# Altium PCB BenchSignalGenerator.PcbDoc (part 1 of 3)
Units mm, origin at the board's own origin, x right, y up, seen from the top; angles counter-clockwise.
Board outline 98.17 x 87.5 mm, 4 copper layers (Top Layer, Ground, 3.3, Bottom Layer), stack 0.603 mm thick; 75 components, 70 nets, 305 pads, 51 vias.
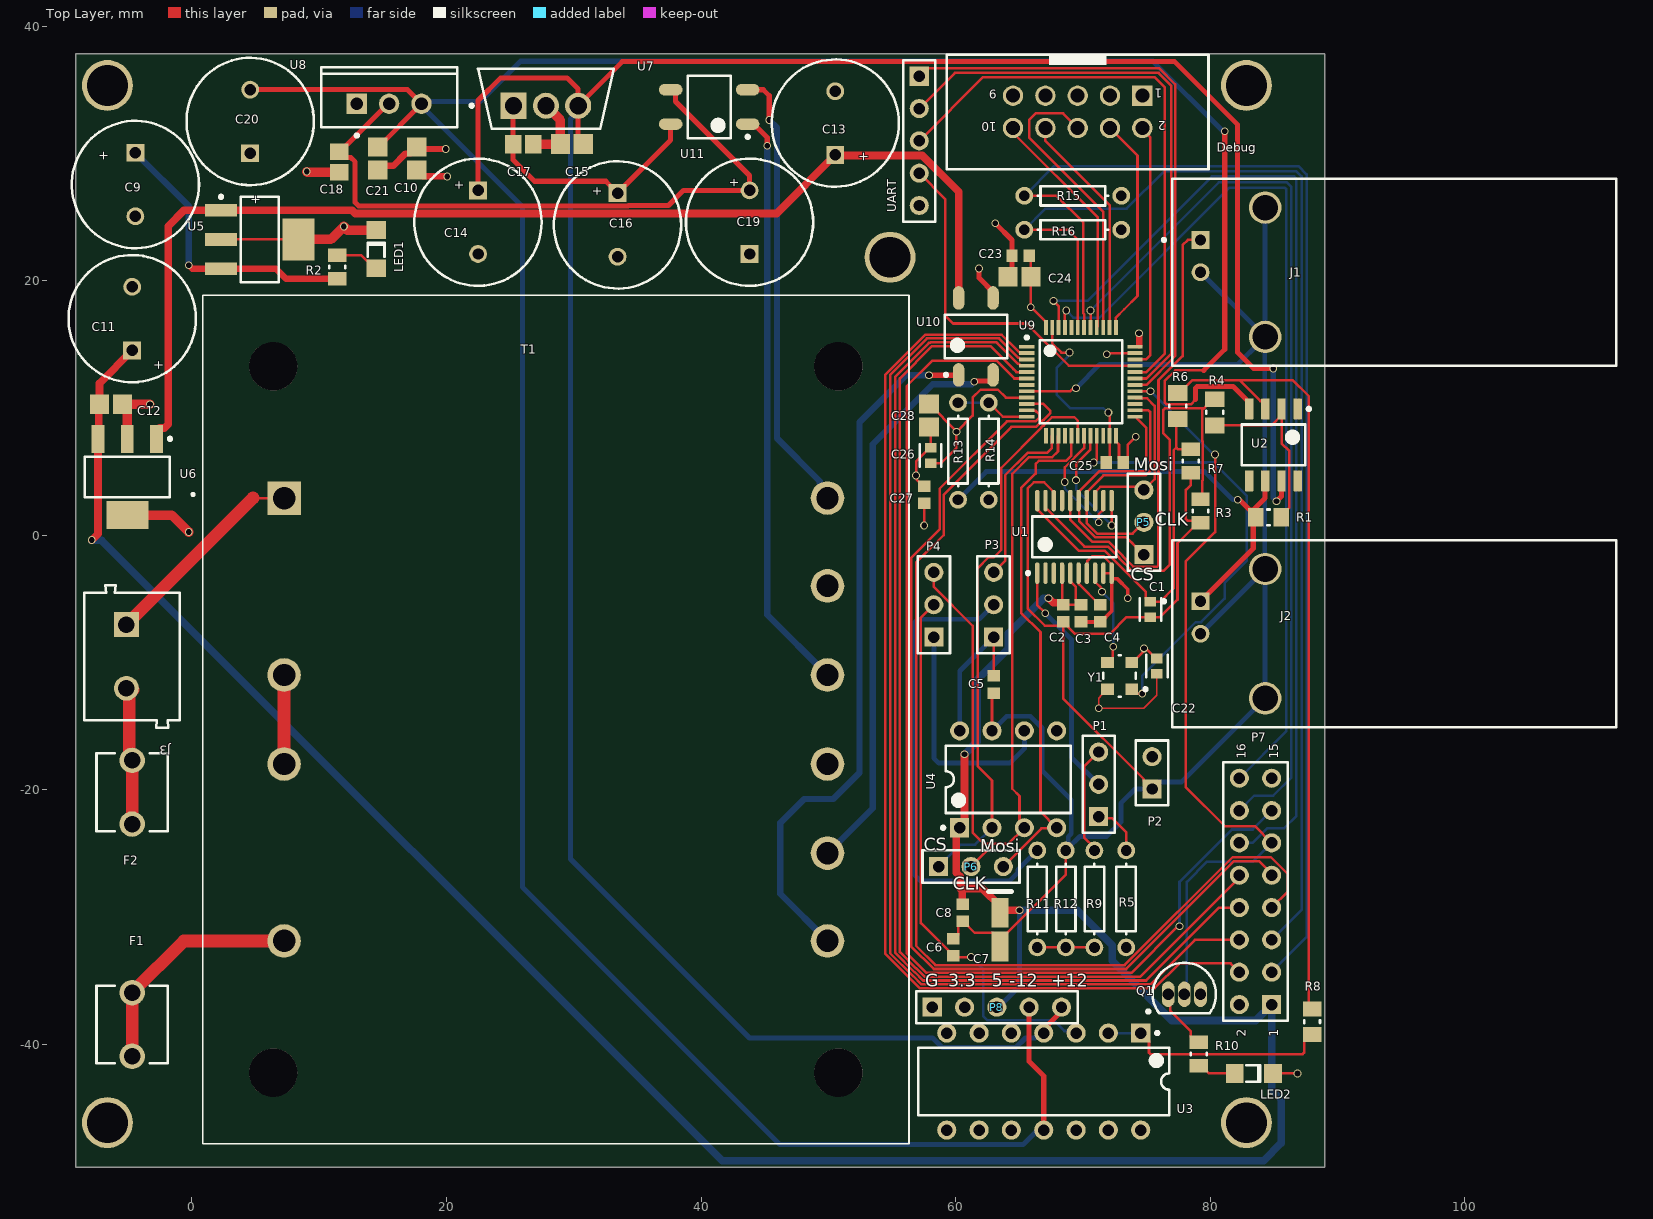
[diagram p0: Top Layer view]
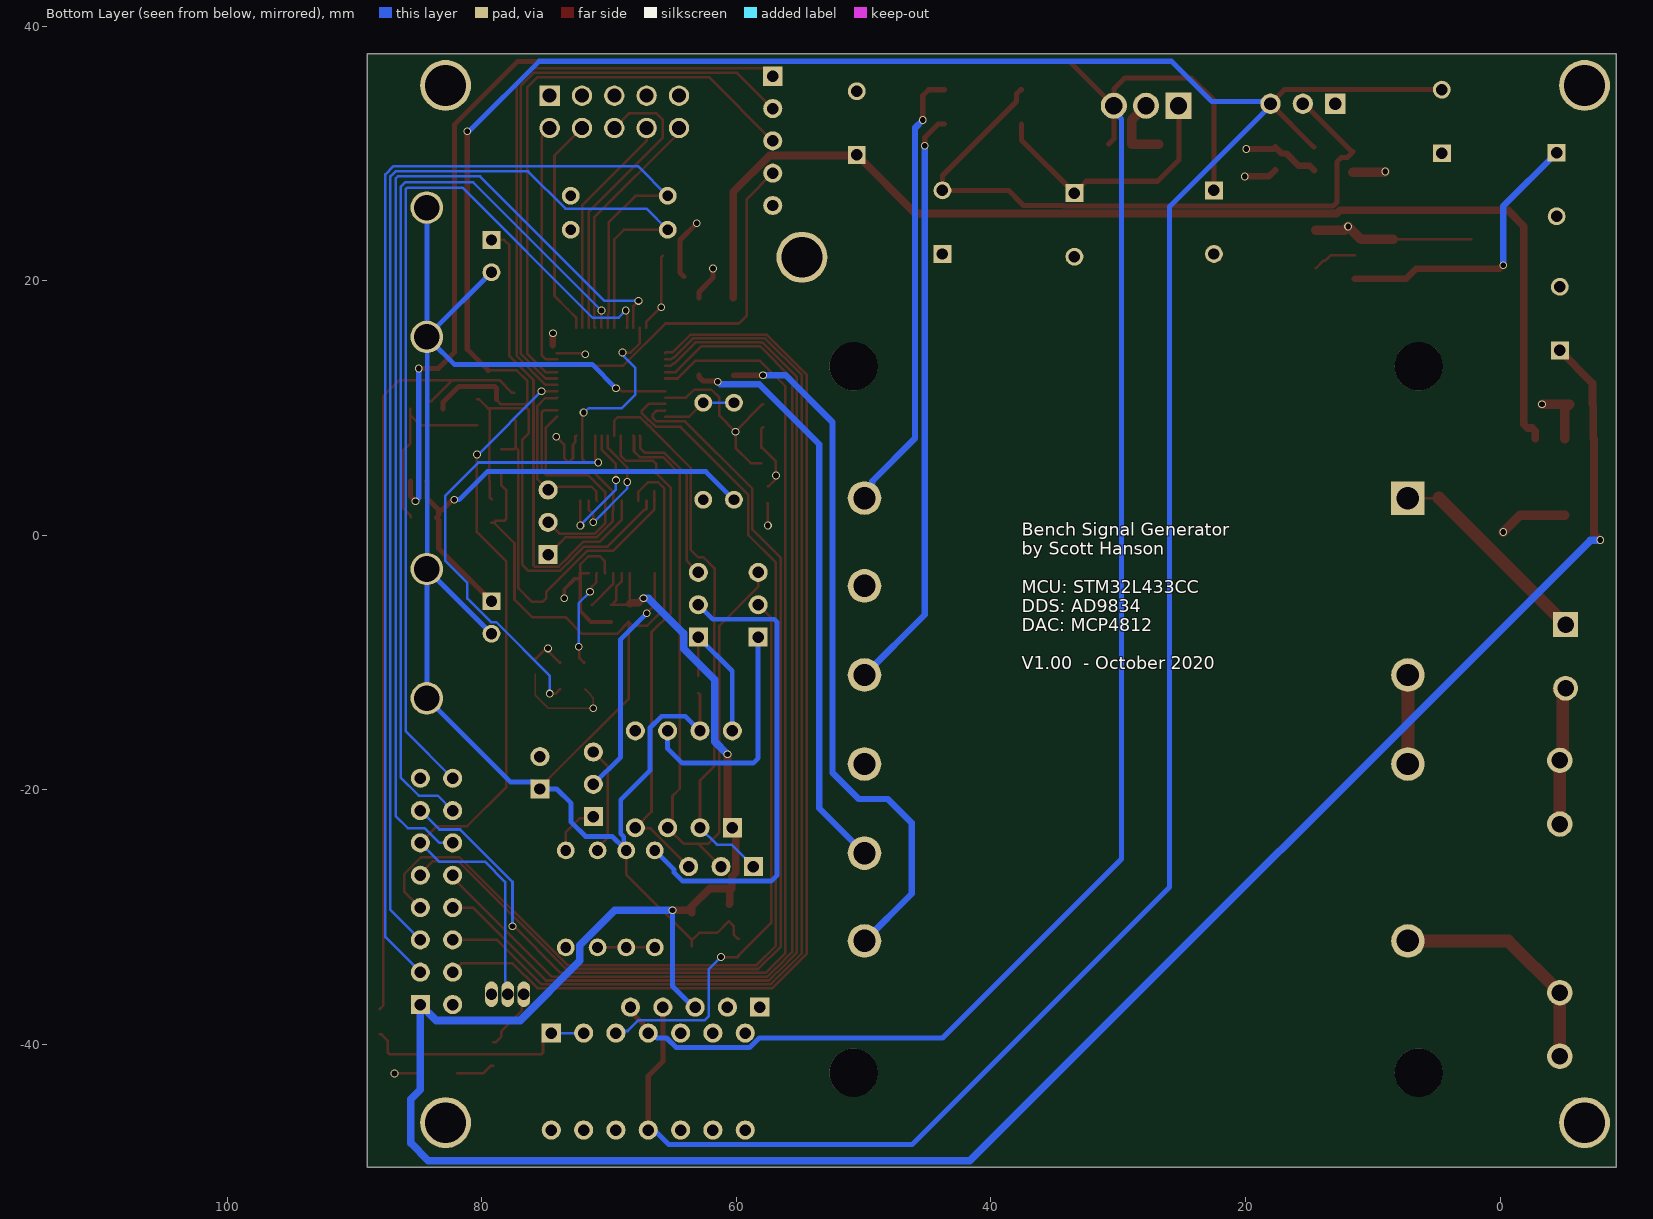
[diagram p1: Bottom Layer view, seen from below]
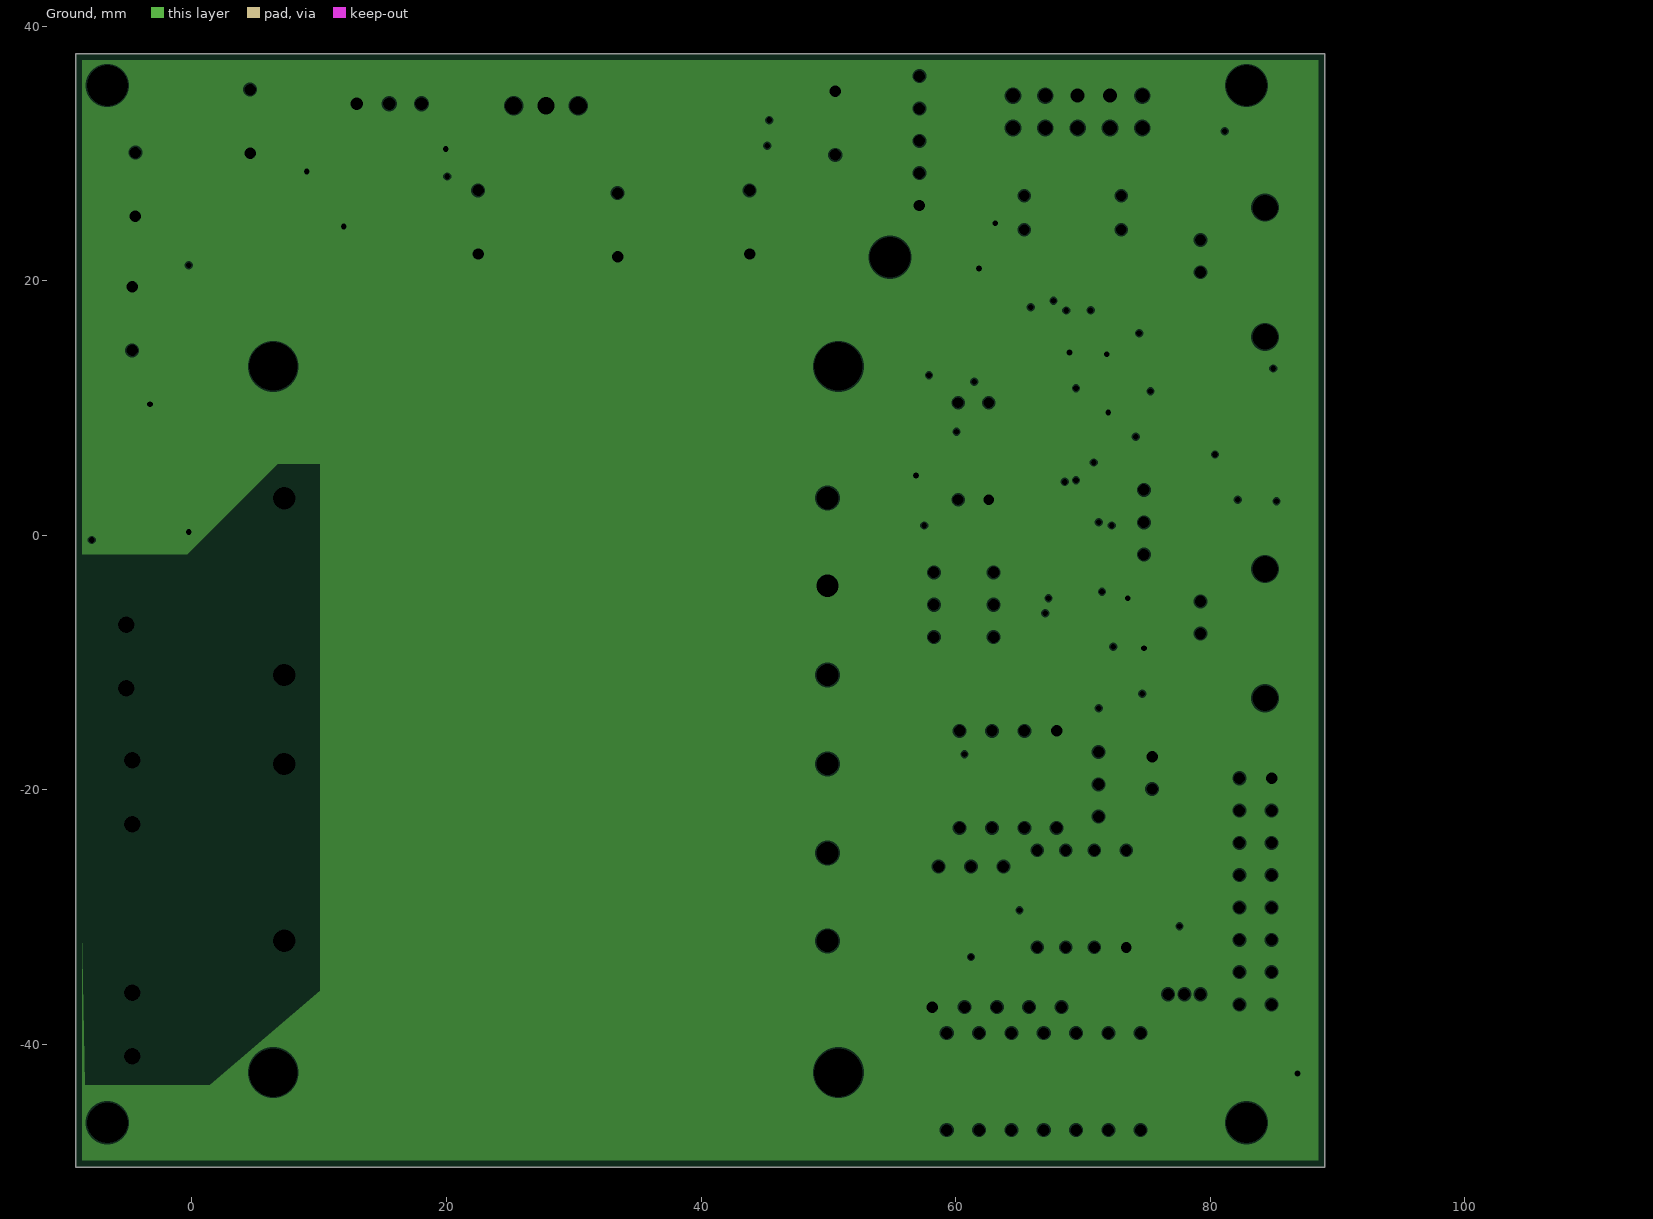
[diagram p2: Ground, clearances drawn from the general rule]
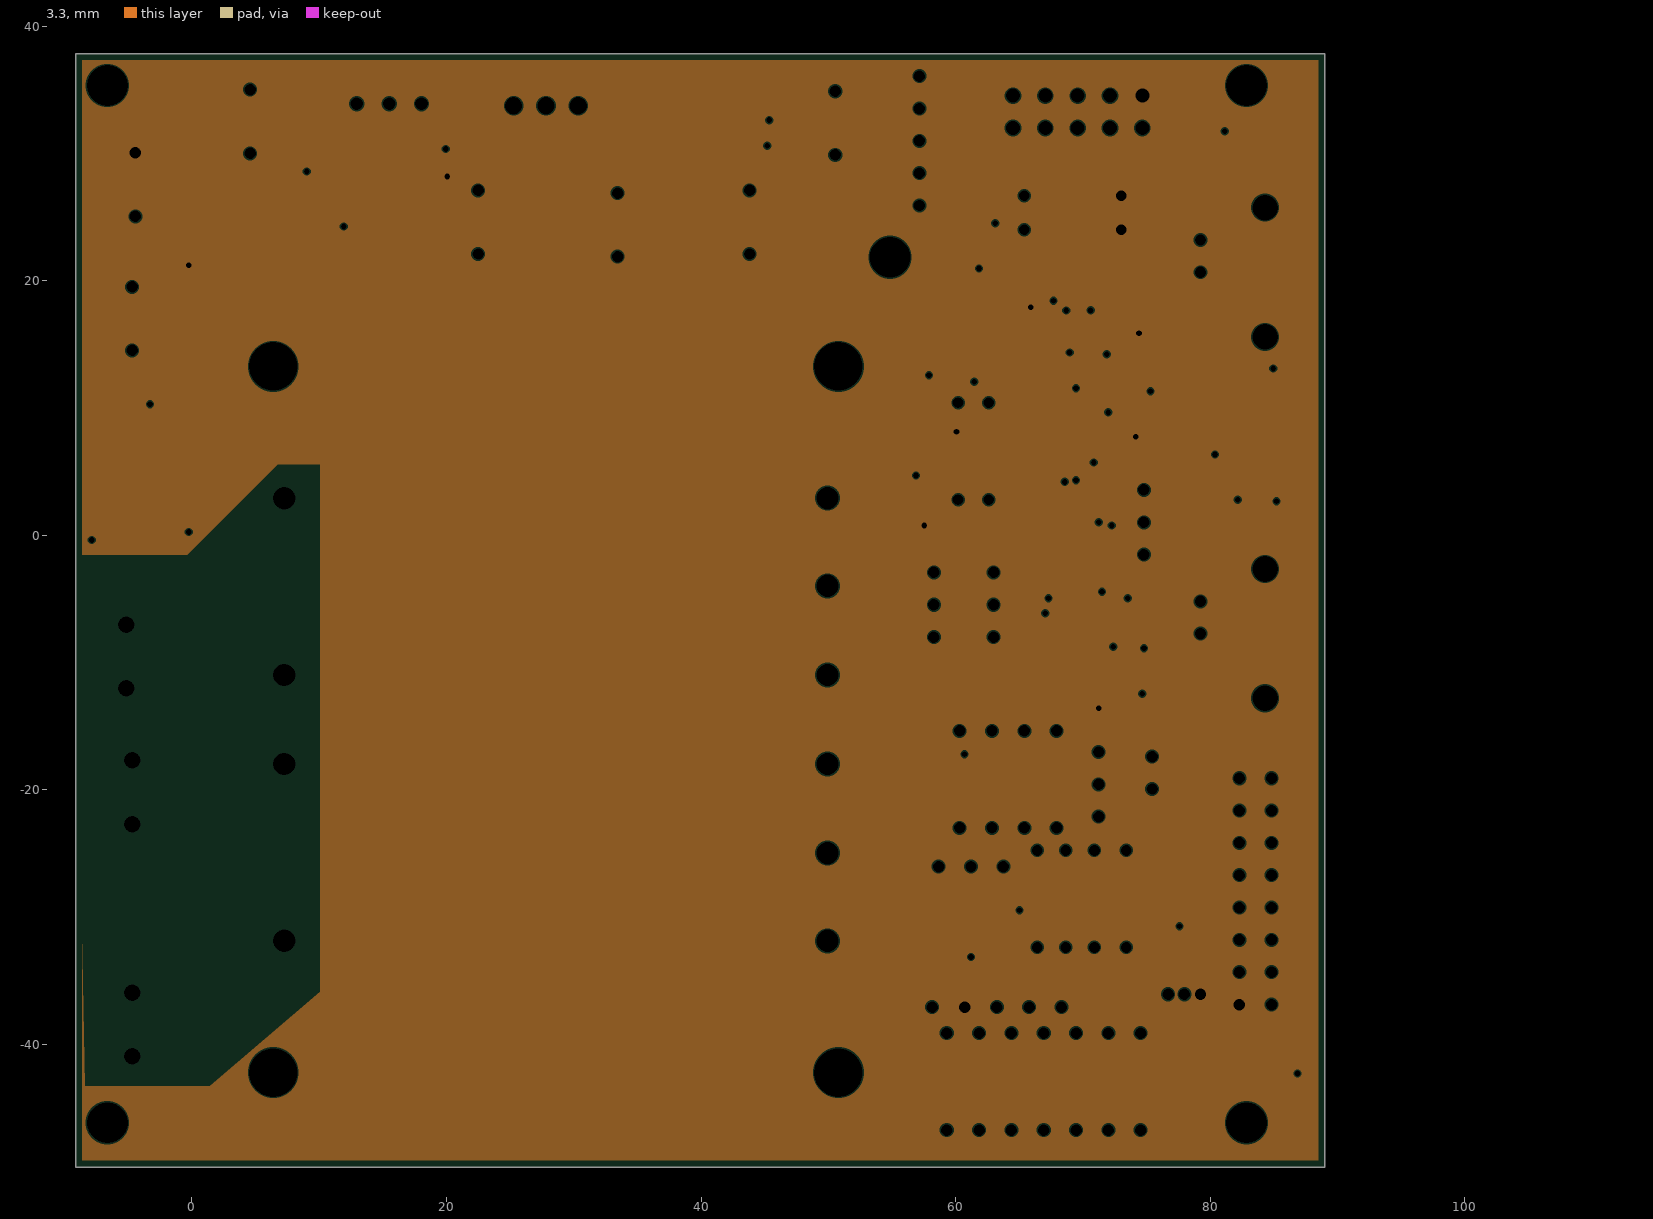
[diagram p3: 3.3, clearances drawn from the general rule]

## Layer stack, top to bottom
Top Solder: solder mask 0.0102, Solder Resist, Dk 3.5
Top Layer: signal copper 0.0356
Dielectric 2: prepreg 0.0711, PP-006, Dk 4.1
Ground: plane copper 0.035, net GND
Dielectric 1: dielectric 0.32, FR-4, Dk 4.8
3.3: plane copper 0.035, net +3.3
Dielectric 3: prepreg 0.0711, PP-006, Dk 4.1
Bottom Layer: signal copper 0.0356
Bottom Solder: solder mask 0.0102, Solder Resist, Dk 3.5

## Board outline
-9.144,-49.67 89.027,-49.67 89.027,37.833 -9.144,37.833

## Design rules (kind name [scope] priority, off if disabled: settings)
BoardOutlineClearance [All] p1: gap=0.2 ignorepadtopadclearanceinfootprint=FALSE
Clearance [All] p1: gap=0.102 ignorepadtopadclearanceinfootprint=FALSE except(0.127: Arc-Via Track-Via SMDPad-Via THPad-Via Via-Via Via-Fill Via-Poly Via-Region Via-Text; 0.25: Arc-Hole Track-Hole SMDPad-Hole THPad-Hole Via-Hole Fill-Hole Poly-Hole Region-Hole Text-Hole)
ComponentClearance [All] p1: gap=0.102 collisioncheckmode=3 verticalgap=0.102 showdistances=TRUE
DiffPairsRouting [All] p1: maxlimit=0.102 minlimit=0.102 mostfreqgap=0.102 toplayer_minwidth=0.102 toplayer_maxwidth=1816.048 toplayer_prefwidth=0.102 bottomlayer_minwidth=0.102 bottomlayer_maxwidth=1816.048 bottomlayer_prefwidth=0.102 maxuncoupledlength=12.7
Height [All] p1: minheight=0 maxheight=1816.048 prefheight=12.7
HoleSize [All] p1: absolutevalues=TRUE maxlimit=6.3 minlimit=0.2 maxpercent=80.000 minpercent=20.000
HoleToHoleClearance [All] p1: gap=0.25 allowstackedmicrovias=FALSE
MinimumAnnularRing [All] p1: minimumring=0.076
MinimumSolderMaskSliver [All] p1: minsoldermaskwidth=0
PlaneClearance [All] p1: clearance=0.102
PlaneConnect PlaneConnectPowerPads [InPadClass('PowerPads')] p1: planeconnectstyle=Direct reliefexpansion=0.508 reliefentries=4 reliefconductorwidth=0.254 reliefairgap=0.254
PlaneConnect [All] p2: pad.planeconnectstyle=Relief pad.reliefexpansion=0.3 pad.reliefentries=4 pad.reliefconductorwidth=0.102 pad.reliefairgap=0.102 via.planeconnectstyle=Direct via.reliefexpansion=0.3 via.reliefentries=4 via.reliefconductorwidth=0.127 via.reliefairgap=0.127
PolygonConnect PolygonConnectPowerPads [All vs (InPadClass('PowerPads'))] p1: connectstyle=Direct reliefconductorwidth=0.254 reliefentries=4 polygonreliefangle="90 Angle" airgapwidth=0.254
PolygonConnect [All] p2: thpad.connectstyle=Relief thpad.reliefconductorwidth=0.102 thpad.reliefentries=4 thpad.polygonreliefangle="90 Angle" thpad.airgapwidth=0.102 smdpad.connectstyle=Relief smdpad.reliefconductorwidth=0.102 smdpad.reliefentries=4 smdpad.polygonreliefangle="90 Angle" smdpad.airgapwidth=0.102 via.connectstyle=Direct via.reliefconductorwidth=0.127 via.reliefentries=4 via.polygonreliefangle="90 Angle" via.airgapwidth=0.127
RoutingVias [All] p1: holewidth=0.2 width=0.45 viastyle="Through Hole" minholewidth=0.2 minwidth=0.45 maxholewidth=6.3 maxwidth=6.55
SilkToSilkClearance [All] p1: silktosilkclearance=0
SilkToSolderMaskClearance [IsPad] p1: minsilkscreentomaskgap=0.102 clearancetoexposedcopper=TRUE
SolderMaskExpansion [All] p1: expansion=0.075 istentingtop=FALSE
Width [All] p1: maxlimit=1816.048 minlimit=0.102 preferedwidth=0.102
20 further rules are at their usual default settings.

## Classes and differential pairs
component class Power: C9 C10 C11 C12 C13 C14 C15 C16 C17 C18 C19 C20 C21 F1 F2 J3 LED1 P2 R2 T T1 U5 U6 U7 U8 U10 U11
component class MCU: C23 C24 C25 C26 C27 C28 P5 P6 R15 R16 U9
component class InputOutput: Debug LED2 P7 Q1 R10 UART
component class AD9834: C1 C2 C3 C4 C5 C6 C7 C8 C22 J1 J2 P1 P3 P4 R1 R3 R4 R5 R6 R7 R8 R9 R11 R12 R13 R14 U1 U2 U3 U4 Y1

## Components (designator, comment, footprint, x,y, rotation, side; value= is the part's Value field where it differs from the comment)
C1 "C0603C220K3GACTU" FP-C0603C-CF-MFG 75.311,-5.855 r270 top value="22 pF"
C2 "C0603C104K4RAC7867" CAPC1608X87X35NL15T15 68.453,-6.149 r90 top
C3 "C0603C104K4RAC7867" CAPC1608X87X35NL15T15 69.85,-6.149 r90 top
C4 "C0603C104K4RAC7867" CAPC1608X87X35NL15T15 71.374,-6.149 r90 top
C5 "C0603C104K4RAC7867" CAPC1608X87X35NL15T15 62.992,-11.737 r90 top
C6 "C0603C104K4RAC7867" CAPC1608X87X35NL15T15 59.817,-32.398 r270 top
C7 "T491A106K016AT" KEMT-A-3216-18-2_M 63.5,-31.001 r270 top
C8 "C0603C104K4RAC7867" CAPC1608X87X35NL15T15 60.567,-29.684 r90 top
C9 "ECA-2AM101" CAPPR65-500-1600X1000X1700 -4.445,27.546 r270 top value=100µF
C10 "C0805C105K3RACAUTO" CAPC2013X140X50ML20T25 17.653,29.578 r270 top
C11 "ECA-2AM101" CAPPR65-500-1600X1000X1700 -4.699,17.005 r90 top value=100µF
C12 "C0805C105K3RACAUTO" CAPC2013X140X50ML20T25 -6.361,10.274 r180 top
C13 "ECA-2AM101" CAPPR65-500-1600X1000X1700 50.546,32.372 r90 top value=100µF
C14 "ECA-2AM101" CAPPR65-500-1600X1000X1700 22.479,24.585 r270 top value=100µF
C15 "C0805C105K3RACAUTO" CAPC2013X140X50ML20T25 29.845,30.721 r0 top
C16 "ECA-2AM101" CAPPR65-500-1600X1000X1700 33.441,24.371 r270 top value=100µF
C17 "C0805C225Z4VACTU" CAPC2013X100X50NL20T25 26.035,30.721 r180 top
C18 "C0805C225Z4VACTU" CAPC2013X100X50NL20T25 11.557,29.324 r90 top
C19 "ECA-2AM101" CAPPR65-500-1600X1000X1700 43.815,24.585 r90 top value=100µF
C20 "ECA-2AM101" CAPPR65-500-1600X1000X1700 4.572,32.499 r90 top value=100µF
C21 "C0805C105K3RACAUTO" CAPC2013X140X50ML20T25 14.605,29.578 r90 top
C22 "C0603C103J5RAC7411" FP-C0603C-CF-MFG 75.819,-10.3 r90 top value="10,000 pF"
C23 "C0603C104K4RAC7867" CAPC1608X87X35NL15T15 65.111,21.958 r180 top
C24 "C0805C475K8PACTU" CAPC2013X145X50ML20T25 65.024,20.307 r180 top
C25 "C0603C104K4RAC7867" CAPC1608X87X35NL15T15 72.517,5.702 r0 top
C26 "C0603C103J5RAC7411" FP-C0603C-CF-MFG 58.039,6.245 r90 top value="10,000 pF"
C27 "C0603C104K4RAC7867" CAPC1608X87X35NL15T15 57.531,3.162 r270 top
C28 "C0805C105K3RACAUTO" CAPC2013X140X50ML20T25 57.912,9.385 r90 top
Debug "61201021621" 61201021621 69.596,33.254 r180 top
F1 "0751.0110" FP-0751_0110-MFG -4.699,-38.454 r90 top
F2 "0751.0110" FP-0751_0110-MFG -4.699,-20.206 r90 top
J1 "1-1337543-0" TECO-1-1337543-0_V 84.328,20.65 r270 top
J2 "1-1337543-0" TECO-1-1337543-0_V 84.328,-7.747 r270 top
J3 "691102710002" 691102710002 -4.699,-9.538 r270 top
LED1 "150120SS75000" 1206_A 14.478,22.466 r270 top
LED2 "150120SS75000" 1206_A 83.439,-42.304 r180 top
P1 "Header 3" HDR1X3 71.247,-22.125 r90 top
P2 "Header 2" HDR1X2 75.438,-19.952 r90 top
P3 "Header 3" HDR1X3 62.992,-8.014 r90 top
P4 "Header 3" HDR1X3 58.293,-8.014 r90 top
P5 "Header 3" HDR1X3 74.803,-1.537 r90 top
P6 "Header 3" HDR1X3 58.674,-26.048 r0 top
P7 "Header 8X2" HDR2X8 84.836,-36.888 r90 top
P8 "Header 5" HDR1X5 58.166,-37.097 r0 top
Q1 "2N3904" TO-92A 77.978,-36.081 r270 top
R1 "RC0805FR-074K7L" YAGO-RC0805_M 84.582,1.384 r180 top
R2 "CRCW0805200RFKEA" RESC2013X50X30NL20T20 11.43,21.069 r90 top
R3 "CRCW0805200RFKEA" RESC2013X50X30NL20T20 79.248,1.892 r270 top
R4 "CRCW08051K00FKEB" RESC2013X50X30ML20T20 80.374,9.648 r270 top
R5 "Res1" AXIAL-0.3 73.406,-28.588 r270 top value=6.3K
R6 "CRCW08051K00FKEB" RESC2013X50X30ML20T20 77.47,10.147 r90 top
R7 "CRCW0805200RFKEA" RESC2013X50X30NL20T20 78.486,5.829 r90 top
R8 "RC0805FR-074K7L" YAGO-RC0805_M 88.011,-38.24 r90 top
R9 "Res1" AXIAL-0.3 70.908,-28.588 r270 top value=6.2K
R10 "CRCW0805200RFKEA" RESC2013X50X30NL20T20 79.121,-40.78 r270 top
R11 "Res11" AXIAL-0.3 66.421,-28.588 r90 top value=6.3K
R12 "Res12" AXIAL-0.3 68.665,-28.588 r270 top value=100
R13 "Res11" AXIAL-0.3 60.198,6.591 r270 top value=1.5M
R14 "Res12" AXIAL-0.3 62.611,6.591 r90 top value=361k
R15 "Res1" AXIAL-0.3 69.215,26.657 r0 top value=1K
R16 "Res1" AXIAL-0.3 69.215,23.99 r0 top value=1K
T1 "14A-30-512" XFMR_14A-30-512 28.589,-14.492 r0 top
U1 "AD9834CRUZ-REEL7" ADI-RU-20_N 69.342,-0.14 r90 top
U2 "LM7171AIM/NOPB" D0008A_M 84.979,7.088 r270 top
U3 "TL084CN" N0014A 66.929,-42.939 r270 top
U4 "MCP4812-E/P" PDIP300-P8 64.135,-19.19 r90 top
U5 "MCP1703-3302E/DB" SOT-223-DB3_M 5.334,23.228 r0 top
U6 "MCP1703-5002E/DB" SOT-223-DB3_N -5.08,4.559 r270 top
U7 "LM7812CT" FP-TO220B03-MFG 27.813,34.277 r90 top
U8 "LM79M12CT" NDE0003A 15.494,33.896 r0 top
U9 "STM32L433CCT6" FP-LQFP48-5B-MFG 69.85,12.052 r0 top
U10 "CDBHD140L-G" SOP270P700X290-4N 61.595,15.608 r90 top
U11 "CDBHD140L-G" SOP270P700X290-4N 40.64,33.642 r180 top
UART "Header 5" HDR1X5 57.15,36.055 r270 top
Y1 "ASEMB-75.000MHZ-LC-T" FP-ASEMB-MFG 72.898,-11.062 r90 top

## Footprints (in the part's own frame and the unit in brackets; to place one, negate y for a bottom-side part, rotate by r counter-clockwise, add the part's x,y. Pads: shape width x height; smd on the part's side, far side on the other; paste and mask are expansions set on the pad)
1206_A [mm] "Chip LED, 2-Leads, Body 3.2x1.6mm, IPC Medium Density"
  rect 1.4x1.5 smd: 1(-1.5,0) 2(1.5,0)
  silkscreen extent -0.5,-0.66 0.6,0.65, body extent -1.6,-0.8 1.6,0.8, height 0.68
61201021621 [mm] "10 pins, straight, gold plating"
  rect 1.6x1.6 hole 1.1: 1(-5.08,-1.27)
  round 1.6 hole 1.1: 2(-5.08,1.27) 3(-2.54,-1.27) 4(-2.54,1.27) 5(0,-1.27) 6(0,1.27) 7(2.54,-1.27) 8(2.54,1.27) 9(5.08,-1.27) 10(5.08,1.27)
  silkscreen extent -10.28,-4.5 10.28,4.5, body extent -10.18,-4.42 10.18,4.75, height 9.13
691102710002 [mm] "5,00mm - modular - blue - Horizontal entry with pressure clamp - 9,9 mm height - 02p"
  rect 1.95x1.95 hole 1.3: 1(-2.5,-0.45)
  round 1.95 hole 1.3: 2(2.5,-0.45)
  silkscreen extent -5.6,-3.75 5.6,3.75, body extent -5.6,-3.75 5.6,3.75, height 9.96
ADI-RU-20_N [mm] "TSOP, 20-Leads, Body 6.5x4.4mm, Pitch 0.65mm, IPC Medium Density"
  oval 1.7x0.35 smd: 1(-2.85,2.925) 2(-2.85,2.275) 3(-2.85,1.625) 4(-2.85,0.975) 5(-2.85,0.325) 6(-2.85,-0.325) 7(-2.85,-0.975) 8(-2.85,-1.625) 9(-2.85,-2.275) 10(-2.85,-2.925) 11(2.85,-2.925) 12(2.85,-2.275) 13(2.85,-1.625) 14(2.85,-0.975) 15(2.85,-0.325) 16(2.85,0.325) 17(2.85,0.975) 18(2.85,1.625) 19(2.85,2.275) 20(2.85,2.925)
  silkscreen extent -2.97,-3.3 1.6,3.77, body extent -2.25,-3.3 2.25,3.3, height 1.2
AXIAL-0.3 [mm] "Axial Device, Thru-Hole; 2 Leads; 0.3 in Pin Spacing"
  round 1.4 hole 0.85: 1(-3.81,0) 2(3.81,0)
  silkscreen extent -2.77,-0.76 2.77,0.76
CAPC1608X87X35NL15T15 [mm] "Chip Capacitor, 2-Leads, Body 1.60x0.80mm, IPC Medium Density"
  rect 0.9x1 smd: 1(-0.675,0) 2(0.675,0)
  body extent -0.87,-0.48 0.87,0.47, height 0.87
CAPC2013X100X50NL20T25 [mm] "Chip Capacitor, 2-Leads, Body 2.00x1.25mm, IPC Medium Density"
  rect 1.3x1.45 smd: 1(-0.8,0) 2(0.8,0)
  body extent -1.1,-0.72 1.1,0.72, height 1
CAPC2013X140X50ML20T25 [mm] "Chip Capacitor, 2-Leads, Body 2.00x1.25mm, IPC Low Density"
  rect 1.5x1.55 smd: 1(-0.9,0) 2(0.9,0)
  body extent -1.1,-0.72 1.1,0.72, height 1.4
CAPC2013X145X50ML20T25 [mm] "Chip Capacitor, 2-Leads, Body 2.00x1.25mm, IPC Low Density"
  rect 1.5x1.55 smd: 1(-0.9,0) 2(0.9,0)
  body extent -1.1,-0.72 1.1,0.72, height 1.45
CAPPR65-500-1600X1000X1700 [mm] "THD, 2-Leads, Dia 10mm, Body Length 16mm"
  rect 1.4x1.4 hole 0.9: 1(-2.5,0)
  round 1.4 hole 0.9: 2(2.5,0)
  silkscreen extent -5,-5 5,5, body extent -5,-5 4.95,5, height 17
D0008A_M [mm] "SOIC, 8-Leads, Body 5x4mm, Pitch 1.27mm, IPC Low Density"
  rrect15% 1.65x0.65 smd: 1(-2.825,1.905) 2(-2.825,0.635) 3(-2.825,-0.635) 4(-2.825,-1.905) 5(2.825,-1.905) 6(2.825,-0.635) 7(2.825,0.635) 8(2.825,1.905)
  silkscreen extent -2.95,-2.5 1.6,2.91, body extent -3,-2.45 3,2.45, height 1.63
FP-0751_0110-MFG [mm]
  round 2 hole 1.3 paste-1000 mask+0: 1(-2.5,0) 1(2.5,0)
  silkscreen extent -3.05,-2.8 3.05,2.8, body extent -3.6,-2.9 3.6,2.9, height 0.25
FP-ASEMB-MFG [mm]
  rect 0.9x1 smd paste+0 mask+0: 1(-1.05,-0.95) 2(1.05,-0.95) 3(1.05,0.95) 4(-1.05,0.95)
  silkscreen extent -1.62,-2.15 1.62,1.27, body extent -1.73,-1.55 1.73,1.55, height 0.25
FP-C0603C-CF-MFG [mm]
  rect 0.75x0.9 smd paste+0 mask+0: 1(-0.6,0) 2(0.6,0)
  silkscreen extent -0.87,-0.85 0.88,0.85, body extent -1.2,-0.6 1.2,0.6, height 0.25
FP-LQFP48-5B-MFG [mm]
  rect 1.2x0.3 smd paste+0 mask+0: 1(-4.25,2.75) 2(-4.25,2.25) 3(-4.25,1.75) 4(-4.25,1.25) 5(-4.25,0.75) 6(-4.25,0.25) 7(-4.25,-0.25) 8(-4.25,-0.75) 9(-4.25,-1.25) 10(-4.25,-1.75) 11(-4.25,-2.25) 12(-4.25,-2.75) 25(4.25,-2.75) 26(4.25,-2.25) 27(4.25,-1.75) 28(4.25,-1.25) 29(4.25,-0.75) 30(4.25,-0.25) 31(4.25,0.25) 32(4.25,0.75) 33(4.25,1.25) 34(4.25,1.75) 35(4.25,2.25) 36(4.25,2.75)
  rect 0.3x1.2 smd paste+0 mask+0: 13(-2.75,-4.25) 14(-2.25,-4.25) 15(-1.75,-4.25) 16(-1.25,-4.25) 17(-0.75,-4.25) 18(-0.25,-4.25) 19(0.25,-4.25) 20(0.75,-4.25) 21(1.25,-4.25) 22(1.75,-4.25) 23(2.25,-4.25) 24(2.75,-4.25) 37(2.75,4.25) 38(2.25,4.25) 39(1.75,4.25) 40(1.25,4.25) 41(0.75,4.25) 42(0.25,4.25) 43(-0.25,4.25) 44(-0.75,4.25) 45(-1.25,4.25) 46(-1.75,4.25) 47(-2.25,4.25) 48(-2.75,4.25)
  silkscreen extent -4.37,-3.25 3.25,3.6, body extent -4.95,-4.95 4.95,4.95, height 0.25
FP-TO220B03-MFG [mm]
  rect 2.05x2.05 hole 1.35 paste-1000 mask+0: 1(-0.54,2.535)
  round 2.05 hole 1.35 paste-1000 mask+0: 2(-0.54,0) 3(-0.54,-2.535)
  silkscreen extent -2.35,-5.34 2.35,5.96, body extent -2.45,-5.44 2.45,5.44, height 0.25
HDR1X2 [mm] "Connector; Header; 2 Position"
  rect 1.5x1.5 hole 0.9: 1(0,0)
  round 1.5 hole 0.9: 2(2.54,0)
  silkscreen extent -1.27,-1.27 3.81,1.27
HDR1X3 [mm] "Connector; Header; 3 Position"
  rect 1.5x1.5 hole 0.9: 1(0,0)
  round 1.5 hole 0.9: 2(2.54,0) 3(5.08,0)
  silkscreen extent -1.27,-1.27 6.35,1.27
HDR1X5 [mm] "Connector; Header; 5 Position"
  rect 1.5x1.5 hole 0.9: 1(0,0)
  round 1.5 hole 0.9: 2(2.54,0) 3(5.08,0) 4(7.62,0) 5(10.16,0)
  silkscreen extent -1.27,-1.27 11.43,1.27
HDR2X8 [mm] "Connector; Header; 8x2 Position"
  rect 1.5x1.5 hole 0.9: 1(0,0)
  round 1.5 hole 0.9: 2(0,2.54) 3(2.54,0) 4(2.54,2.54) 5(5.08,0) 6(5.08,2.54) 7(7.62,0) 8(7.62,2.54) 9(10.16,0) 10(10.16,2.54) 11(12.7,0) 12(12.7,2.54) 13(15.24,0) 14(15.24,2.54) 15(17.78,0) 16(17.78,2.54)
  silkscreen extent -1.27,-1.27 19.05,3.81
KEMT-A-3216-18-2_M [mm] "Molded TAN Capacitor, 2-Leads, Body 3.4x1.8mm, IPC Low Density"
  rect 2.35x1.35 smd: 1(-1.325,0) 2(1.325,0)
  silkscreen extent -3,-0.9 -3,0.9, body extent -1.7,-0.9 1.7,0.9, height 1.8
N0014A [mm] "DIP, 14-Leads, Body 19.7x6.6mm, Pitch 2.54mm"
  rect 1.5x1.5 hole 0.9: 1(-3.81,7.62)
  round 1.5 hole 0.9: 2(-3.81,5.08) 3(-3.81,2.54) 4(-3.81,0) 5(-3.81,-2.54) 6(-3.81,-5.08) 7(-3.81,-7.62) 8(3.81,-7.62) 9(3.81,-5.08) 10(3.81,-2.54) 11(3.81,0) 12(3.81,2.54) 13(3.81,5.08) 14(3.81,7.62)
  silkscreen extent -3.93,-9.85 2.65,9.85, body extent -3.95,-9.85 3.95,9.85, height 5.08
NDE0003A [mm] "FM, 3-Leads, Body 10.7x4.7mm, Pitch 2.54mm"
  rect 1.6x1.6 hole 1: 1(-2.54,0)
  round 1.6 hole 1: 2(0,0) 3(2.54,0)
  silkscreen extent -5.35,-2.62 5.35,2.85, body extent -5.4,-1.9 5.4,2.9, height 19.4
PDIP300-P8 [mm] "8-Pin Plastic Dual In-Line Package (PDIP)"
  rect 1.5x1.5 hole 0.9: 1(-3.81,3.81)
  round 1.5 hole 0.9: 2(-3.81,1.27) 3(-3.81,-1.27) 4(-3.81,-3.81) 5(3.81,-3.81) 6(3.81,-1.27) 7(3.81,1.27) 8(3.81,3.81)
  silkscreen extent -3.93,-4.9 2.65,5.23, body extent -3.55,-4.9 3.55,4.9, height 4.32
RESC2013X50X30ML20T20 [mm] "Chip Resistor, 2-Leads, Body 2.00x1.25mm, IPC Low Density"
  rect 1.25x1.55 smd: 1(-1.025,0) 2(1.025,0)
  silkscreen extent -0.1,-0.67 0.1,0.67, body extent -1.1,-0.72 1.1,0.72, height 0.5
RESC2013X50X30NL20T20 [mm] "Chip Resistor, 2-Leads, Body 2.00x1.25mm, IPC Medium Density"
  rect 1.05x1.45 smd: 1(-0.925,0) 2(0.925,0)
  silkscreen extent -0.1,-0.62 0.1,0.62, body extent -1.1,-0.72 1.1,0.72, height 0.5
SOP270P700X290-4N [mm] "SOP, 4-Leads, Body 4.70x4.00mm, Pitch 2.70mm, IPC Medium Density"
  oval 1.85x0.9 smd: 1(-3.025,1.35) 2(-3.025,-1.35) 3(3.025,-1.35) 4(3.025,1.35)
  silkscreen extent -3.15,-2.45 1.7,2.47, body extent -3.5,-2.45 3.5,2.45, height 2.9
SOT-223-DB3_M [mm] "SOT223, 4-Leads, Body 6.5x3.5mm, Pitch 2.3mm, Lead Span 7mm, IPC Low Density"
  rect 2.5x1 smd: 1(-3.05,2.3) 2(-3.05,0) 3(-3.05,-2.3)
  rect 2.5x3.3 smd: 4(3.05,0)
  silkscreen extent -3.17,-3.35 1.5,3.47, body extent -1.85,-3.35 1.85,3.35, height 1.8
SOT-223-DB3_N [mm] "SOT223, 4-Leads, Body 6.5x3.5mm, Pitch 2.3mm, Lead Span 7mm, IPC Medium Density"
  rect 2.2x1 smd: 1(-3,2.3) 2(-3,0) 3(-3,-2.3)
  rect 2.2x3.3 smd: 4(3,0)
  silkscreen extent -3.12,-3.35 1.6,3.48, body extent -1.85,-3.35 1.85,3.35, height 1.8
TECO-1-1337543-0_V [mm] "SMD, 2-Leads, Body 34.9x14.7mm, Pitch 2.54mm"
  rect 1.4x1.4 hole 0.89: 1(-2.54,-5.08)
  round 1.4 hole 0.89: 2(0,-5.08)
  round 2.55 hole 2.01: MH1(-5.08,0) MH2(5.08,0)
  silkscreen extent -7.35,-8.07 7.35,27.6, body extent -7.35,-7.1 7.35,28.05, height 15.8
TO-92A [mm] "TO, Flat Index; 3 In-Line, Axial Leads; Body Dia. 4.5mm; Leads 0.51 x 0.48 mm (max)"
  oval 2x1 hole 0.9: 1(0,-1.27) 2(0,0) 3(0,1.27)
  silkscreen extent -2.48,-2.95 1.5,2.48, body extent -2.48,-2.5 1.5,2.5, height 6.86
XFMR_14A-30-512 [mm]
  rect 2.64x2.64 hole 1.76: 1(-21.35,17.4)
  round 2.64 hole 1.76: 3(-21.35,3.5) 4(-21.35,-3.5) 6(-21.35,-17.4) 7(21.35,17.4) 8(21.35,10.5) 9(21.35,3.5) 10(21.35,-3.5) 11(21.35,-10.5) 12(21.35,-17.4)
  round 3.8 hole 3.8 unplated: ""(-22.2,-27.75) ""(-22.2,27.75) ""(22.2,-27.75) ""(22.2,27.75)
  silkscreen extent -28.6,-33.35 27.75,33.35
YAGO-RC0805_M [mm] "Chip Resistor, 2-Leads, Body 2.00x1.25mm, IPC Low Density"
  rect 1.2x1.45 smd: 1(-1,0) 2(1,0)
  silkscreen extent -0.1,-0.62 0.1,0.62, body extent -1,-0.62 1,0.63, height 0.6

## Part data
C1: library part CMP-03020-026109-1, "CAP CER 22PF 25V 10% NP0 0603", Capacitance="22 pF", Case Code (Imperial)=0603, Case Code (Metric)=1608, Dielectric=C0G, Dielectric Material=Ceramic, Manufacturer=KEMET, Max Operating Temperature=125°C, Min Operating Temperature=-55°C, Package=C0603C-CF, Package Quantity=4000, Temperature="-55°C to +125°C", Temperature Coefficient=30ppm/°C, Temperature Range High=+125°C, Tolerance=0.1, Voltage Rating="25 V", Voltage Rating (DC)=25V, Automotive=Yes, Automotive Grade="Grade 1", Case/Package=0603, Category=Cap, ComponentLink1Description=https://datasheet.ciiva.com/5413/kem-c1003-c0g-smd-356956-5413159.pdf?src-supplier=Mouser, ComponentLink1URL=https://datasheet.ciiva.com/5413/kem-c1003-c0g-smd-356956-5413159.pdf?src-supplier=Mouser, ComponentLink2Description=Datasheet, ComponentLink2URL=https://api.kemet.com/component-edge/download/datasheet/C0603C100J5GACAUTO.pdf, Contact Plating=Tin,Matte, Depth=0.8mm, Device Class L1="Passive Components", Device Class L2=Capacitors, Device Class L3="Ceramic Capacitors", Digikey Description="CAP CER 22PF 25V 10% NP0 0603", Dissipation Factor=0.1%, Height=0.87mm, Lead Free=Yes, Lead Pitch=0.7mm, Length=1.6mm, Manufacturer Part Number=C0603C220K3GACTU, Material=Ceramic, Mount="Surface Mount", Mouser Description="Multilayer Ceramic Capacitors MLCC - SMD/SMT 25volts 22pF C0G 10%", Octopart=https://octopart.com/c0603c220k3gactu-kemet-9139809, Packaging="Tape and Reel", Pricing 1="1=0.10000, 10=0.07500, 50=0.04060, 100=0.03320, 500=0.02372, 1000=0.01863 (USD)", RoHS=TRUE, Stock 1=72525, Temperature Characteristic=C0G, Temperature Range Low=-55°C, Termination=SMD/SMT, Thickness=0.034inch, Width=0.031inch
C2 C5 C6 C8 C23 C25 C27: library part CMP-2006-03811-1, "0.1uF Ceramic", Capacitance=100nF, Case Code (Imperial)=0603, Case Code (Metric)=1608, Dielectric=X7R, Dielectric Material=Ceramic, Manufacturer=Kemet, Max Operating Temperature=125°C, Min Operating Temperature=-55°C, Package Quantity=4000, Tolerance=10%, Voltage=16V, Case/Package=0603, Category="Ceramic Capacitors", ComponentLink1Description=https://datasheet.ciiva.com/14589/70095383-14589014.pdf?src-supplier=Allied+Electronics, ComponentLink1URL=https://datasheet.ciiva.com/14589/70095383-14589014.pdf?src-supplier=Allied+Electronics, ComponentLink2Description=https://datasheet.ciiva.com/18192/getdatasheetpartid-330584-18192695.pdf?src-supplier=Verical, ComponentLink2URL=https://datasheet.ciiva.com/18192/getdatasheetpartid-330584-18192695.pdf?src-supplier=Verical, ComponentLink3Description=https://datasheet.ciiva.com/22749/kem-c1002-x7r-smd-22749657.pdf?src-supplier=Element14, ComponentLink3URL=https://datasheet.ciiva.com/22749/kem-c1002-x7r-smd-22749657.pdf?src-supplier=Element14, ComponentLink4Description=https://datasheet.ciiva.com/5413/kem-c1002-x7r-smd-5413791.pdf?src-supplier=Mouser, ComponentLink4URL=https://datasheet.ciiva.com/5413/kem-c1002-x7r-smd-5413791.pdf?src-supplier=Mouser, Contact Plating=Tin,Matte, Depth=0.8mm, Dissipation Factor=3.5%, Height=0.8mm, Lead Pitch=0.7mm, Length=1.6mm, Mount="Surface Mount,PCB", Number of Pins=2, Packaging="Tape and Reel", Part Number=C0603C104K4RAC7867, Pricing 1="1=0.12000, 10=0.08700, 50=0.04720, 100=0.03850, 500=0.02752, 1000=0.02163 (USD)", Radiation Hardening=No, REACH SVHC="No SVHC", RoHS=Yes, Stock 1=2000839, Termination=SMD/SMT, Thickness=0.034inch, Voltage Rating=16V, Voltage Rating (DC)=16V, Width=0.8mm
C3 C4: library part CMP-2006-03811-1, Capacitance=100nF, Case Code (Imperial)=0603, Case Code (Metric)=1608, Dielectric=X7R, Dielectric Material=Ceramic, Manufacturer=Kemet, Max Operating Temperature=125°C, Min Operating Temperature=-55°C, Package Quantity=4000, Tolerance=10%, Voltage=16V, Case/Package=0603, Category="Ceramic Capacitors", ComponentLink1Description=https://datasheet.ciiva.com/14589/70095383-14589014.pdf?src-supplier=Allied+Electronics, ComponentLink1URL=https://datasheet.ciiva.com/14589/70095383-14589014.pdf?src-supplier=Allied+Electronics, ComponentLink2Description=https://datasheet.ciiva.com/18192/getdatasheetpartid-330584-18192695.pdf?src-supplier=Verical, ComponentLink2URL=https://datasheet.ciiva.com/18192/getdatasheetpartid-330584-18192695.pdf?src-supplier=Verical, ComponentLink3Description=https://datasheet.ciiva.com/22749/kem-c1002-x7r-smd-22749657.pdf?src-supplier=Element14, ComponentLink3URL=https://datasheet.ciiva.com/22749/kem-c1002-x7r-smd-22749657.pdf?src-supplier=Element14, ComponentLink4Description=https://datasheet.ciiva.com/5413/kem-c1002-x7r-smd-5413791.pdf?src-supplier=Mouser, ComponentLink4URL=https://datasheet.ciiva.com/5413/kem-c1002-x7r-smd-5413791.pdf?src-supplier=Mouser, Contact Plating=Tin,Matte, Depth=0.8mm, Dissipation Factor=3.5%, Height=0.8mm, Lead Pitch=0.7mm, Length=1.6mm, Mount="Surface Mount,PCB", Number of Pins=2, Packaging="Tape and Reel", Part Number=C0603C104K4RAC7867, Pricing 1="1=0.12000, 10=0.08700, 50=0.04720, 100=0.03850, 500=0.02752, 1000=0.02163 (USD)", Radiation Hardening=No, REACH SVHC="No SVHC", RoHS=Yes, Stock 1=2000839, Termination=SMD/SMT, Thickness=0.034inch, Voltage Rating=16V, Voltage Rating (DC)=16V, Width=0.8mm
C7: library part CMP-2000-05173-1, "Capacitor, Tantalum, 10 uF, +/- 10%, 16 V, -55 to 125 degC, 2-Pin SMD (1206), RoHS, Tape and Reel", Capacitance=10uF, Case Code=A, Case Style=Molded, Manufacturer=Kemet, Operating Temp Range=-55Cto125C, Package / Case=3216-18, Package Description="2-Pin Surface Mount Device, Body 3.2 x 1.6 mm", Package Reference=1206, Tolerance (+ or -)=10%, Voltage=16VDC, Construction=SMTChip, Datasheet URL=http://www.farnell.com/datasheets/1824869.pdf, Datasheet Version=Apr-14, DCL=1.6uA, DF=8%, ESR=7ohm, Failure Rate=NotRequired, Insulation=NotRequired, Lead Spacing (nom)=NotRequiredmm, Length W/Weld=NotRequiredmm, Manufacturer URL=http://www.kemet.com/, Mounting Style=SurfaceMount, Packaging=TapeandReel, Polarity=Polar, Product Depth (mm)=1.6mm, Product Diameter (mm)=NotRequiredmm, Product Height (mm)=1.6mm, Product Length (mm)=3.2mm, Seal=NotRequired, Seated Plane Height=NotRequiredmm, Wire Form=NotRequired
C9 C11 C13 C14 C16 C19 C20: library part CMP-001-00034-5, "Aluminum Electrolytic Capacitor, 100 uF, +/- 20%, 100 V, -40 to 85 degC, 2-Pin THD, RoHS, Bulk", Capacitor Type=Electrolytic, Case/Package=Radial, Manufacturer=Panasonic, Max Operating Temperature=85°C, Min Operating Temperature=-40°C, Package Description="2-Pin Through Hole Device, Dia 10 mm, Body Length 16 mm", Package Quantity=200, Package Reference=CAPPR65-500-1600X1000X1700, Ripple Current=350mA, Tolerance=20%, Voltage Rating=100V, Datasheet URL=https://industrial.panasonic.com/cdbs/www-data/pdf/RDF0000/ABA0000C1047.pdf, Datasheet Version=Mar-16, Diameter=10mm, Lead Pitch=5mm, Manufacturer URL=http://www.panasonic.com/, Mounting Technology=TH, Packaging=Bulk, Pins=2, Ripple Current (AC)=350mA, RoHS Compliant=True
C10 C12 C15 C21 C28: library part CMP-2007-03233-1, Capacitance=1uF, Case Code (Imperial)=0805, Case Code (Metric)=2012, Dielectric=X7R, Dielectric Material=Ceramic, Manufacturer=Kemet, Max Operating Temperature=125°C, Min Operating Temperature=-55°C, Package Quantity=1, Ratings=AEC-Q200, Supplier Part Number 1=399-6929-1-ND, Tolerance=10%, Voltage Rating=25V, Case/Package=0805, Category="Ceramic Capacitors", ComponentLink1Description=https://datasheet.ciiva.com/6074/1732735-6074357.pdf?src-supplier=Farnell, ComponentLink1URL=https://datasheet.ciiva.com/6074/1732735-6074357.pdf?src-supplier=Farnell, ComponentLink2Description=https://datasheet.ciiva.com/7842/1732735-7842186.pdf?src-supplier=Element14, ComponentLink2URL=https://datasheet.ciiva.com/7842/1732735-7842186.pdf?src-supplier=Element14, Depth=1.25mm, Height=1.25mm, Length=2mm, Manufacturer Part Number=C0805C105K3RACAUTO, Mount="Surface Mount", Packaging="Cut Tape", Part Number=C0805C105K3RACAUTO, Pricing 1="1=0.18000, 10=0.12100, 50=0.07280, 100=0.06140, 500=0.04204, 1000=0.03719 (USD)", Radiation Hardening=No, REACH SVHC="No SVHC", RoHS=Yes, Stock 1=71727, Supplier 1=Digi-Key, Thickness=0.055inch, Voltage Rating (DC)=25V, Width=0.049inch
C17 C18: library part CMP-2007-03689-1, Capacitance=2.2uF, Case Code (Imperial)=0805, Case Code (Metric)=2012, Dielectric=Y5V, Dielectric Material=Ceramic, Manufacturer=Kemet, Max Operating Temperature=85°C, Min Operating Temperature=-30°C, Package Quantity=1, Supplier Part Number 1=399-1295-1-ND, Tolerance=80%, Voltage=16V, Case/Package=0805, Category="Ceramic Capacitors", ComponentLink1Description=https://datasheet.ciiva.com/7842/1698780-7842295.pdf?src-supplier=Element14, ComponentLink1URL=https://datasheet.ciiva.com/7842/1698780-7842295.pdf?src-supplier=Element14, ComponentLink2Description=https://datasheet.ciiva.com/7842/1698780-7842296.pdf?src-supplier=Element14, ComponentLink2URL=https://datasheet.ciiva.com/7842/1698780-7842296.pdf?src-supplier=Element14, ComponentLink3Description=https://datasheet.ciiva.com/18102/getdatasheetpartid-63401-18102155.pdf?src-supplier=Verical, ComponentLink3URL=https://datasheet.ciiva.com/18102/getdatasheetpartid-63401-18102155.pdf?src-supplier=Verical, Depth=1.25mm, Height=0.9mm, Lead Free="Lead Free", Lead Pitch=0.75mm, Length=2mm, Manufacturer Part Number=C0805C225Z4VACTU, Mount="Surface Mount", Packaging="Tape and Reel", Part Number=C0805C225Z4VACTU, Pricing 1="1=0.20000, 10=0.13600, 50=0.08160, 100=0.06900, 500=0.04720, 1000=0.04175 (USD)", Radiation Hardening=No, REACH SVHC="No SVHC", RoHS=Yes, Stock 1=131695, Supplier 1=Digi-Key, Termination=SMD/SMT, Thickness=0.055inch, Voltage Rating=16V, Voltage Rating (DC)=16V, Width=0.049inch
C22 C26: library part CMP-03020-011072-1, "CAP CER 10000PF 50V X7R 0603", Capacitance="10,000 pF", Case Code (Imperial)=0603, Case Code (Metric)=1608, Dielectric=X7R, Dielectric Material=Ceramic, Manufacturer=KEMET, Max Operating Temperature=125°C, Min Operating Temperature=-55°C, Package=C0603C-CF, Package Quantity=15000, Supplier Part Number 1=399-7370-2-ND, Temperature="-55°C to +125°C", Temperature Coefficient=30ppm/°C, Temperature Range High=+125°C, Tolerance=0.05, Voltage Rating="50 V", Voltage Rating (DC)=50V, Automotive=Yes, Automotive Grade="Grade 1", Case/Package=0603, Category=Cap, ComponentLink1Description=https://datasheet.ciiva.com/5411/kem-c1002-x7r-smd-357932-5411286.pdf?src-supplier=Mouser, ComponentLink1URL=https://datasheet.ciiva.com/5411/kem-c1002-x7r-smd-357932-5411286.pdf?src-supplier=Mouser, ComponentLink2Description=Datasheet, ComponentLink2URL=https://api.kemet.com/component-edge/download/datasheet/C0603C100J5GACAUTO.pdf, Depth=0.8mm, Device Class L1="Passive Components", Device Class L2=Capacitors, Device Class L3="Ceramic Capacitors", Digikey Description="CAP CER 10000PF 50V X7R 0603", Dissipation Factor=2.5%, Height=0.87mm, Lead Free=Yes, Lead Pitch=0.7mm, Length=1.6mm, Manufacturer Part Number=C0603C103J5RAC7411, Material=Ceramic, Mount="Surface Mount", Mouser Description="Cap Ceramic 0.01uF 50V X7R 5% SMD 0603 125°C Punched Paper T/R", Octopart=https://octopart.com/c0603c103j5rac7411-kemet-3901156, Packaging="Tape and Reel", Pricing 1="15000=0.00836, 30000=0.00794, 75000=0.00711 (USD)", RoHS=TRUE, Stock 1=15000, Supplier 1=Digi-Key, Temperature Characteristic=X7R, Temperature Range Low=-55°C, Termination=SMD/SMT, Thickness=0.035inch, Width=0.031inch
C24: library part CMP-2007-01007-1, Capacitance=4.7uF, Case Code (Imperial)=0805, Case Code (Metric)=2012, Dielectric=X5R, Dielectric Material=Ceramic, Manufacturer=Kemet, Max Operating Temperature=85°C, Min Operating Temperature=-55°C, Package Quantity=1, Supplier Part Number 1=399-3133-1-ND, Tolerance=10%, Voltage=10V, Case/Package=0805, Category="Ceramic Capacitors", ComponentLink1Description=https://datasheet.ciiva.com/18193/getdatasheetpartid-179373-18193909.pdf?src-supplier=Verical, ComponentLink1URL=https://datasheet.ciiva.com/18193/getdatasheetpartid-179373-18193909.pdf?src-supplier=Verical, ComponentLink2Description=https://datasheet.ciiva.com/7842/40889-7842616.pdf?src-supplier=Element14, ComponentLink2URL=https://datasheet.ciiva.com/7842/40889-7842616.pdf?src-supplier=Element14, ComponentLink3Description=https://datasheet.ciiva.com/6126/40889-6126699.pdf?src-supplier=Farnell, ComponentLink3URL=https://datasheet.ciiva.com/6126/40889-6126699.pdf?src-supplier=Farnell, ComponentLink4Description=https://datasheet.ciiva.com/28614/1918694-28614763.pdf?src-supplier=Element14, ComponentLink4URL=https://datasheet.ciiva.com/28614/1918694-28614763.pdf?src-supplier=Element14, ComponentLink5Description=https://datasheet.ciiva.com/46385/1791935-46385676.pdf?src-supplier=Element14, ComponentLink5URL=https://datasheet.ciiva.com/46385/1791935-46385676.pdf?src-supplier=Element14, Depth=1.25mm, Dissipation Factor=5%, Height=1.25mm, Lead Free="Lead Free", Lead Pitch=0.75mm, Length=2mm, Manufacturer Part Number=C0805C475K8PACTU, Mount="Surface Mount", Number of Pins=2, Packaging="Tape and Reel", Part Number=C0805C475K8PACTU, Pricing 1="1=0.25000, 10=0.17100, 50=0.10240, 100=0.08640, 500=0.05914, 1000=0.05232 (USD)", Radiation Hardening=No, REACH SVHC="No SVHC", RoHS=Yes, Stock 1=286427, Supplier 1=Digi-Key, Termination=SMD/SMT, Thickness=0.055inch, Voltage Rating=10V, Voltage Rating (DC)=10V, Width=1.2mm
Debug: library part CMP-1502-00007-1, "Male Box Header WR-BHD, THT, Vertical, pitch 2.54 mm, 10 pins", Color=Black, Contact Resistance=20mOhm, Current Rating=3A, Flammability Rating="UL94 V-0", Insulation Resistance=1GR, Manufacturer="Wurth Elektronik", Max Operating Temperature=125°C, Min Operating Temperature=-40°C, Operating Temperature=-40to125degC, Package Quantity=260, Supplier Part Number 1=732-2094-ND, Voltage Rating=250V, Withstanding Voltage=500VAC, Working Voltage=250VAC, Category="Headers and Wire Housings", ComponentLink1Description=https://datasheet.ciiva.com/731/6120xx21621-731344.pdf?src-supplier=Digi-Key, ComponentLink1URL=https://datasheet.ciiva.com/731/6120xx21621-731344.pdf?src-supplier=Digi-Key, ComponentLink2Description=https://datasheet.ciiva.com/15395/6120xx21621-265834-15395106.pdf?src-supplier=Mouser, ComponentLink2URL=https://datasheet.ciiva.com/15395/6120xx21621-265834-15395106.pdf?src-supplier=Mouser, ComponentLink3Description=https://datasheet.ciiva.com/7648/76595-7648121.pdf?src-supplier=Element14, ComponentLink3URL=https://datasheet.ciiva.com/7648/76595-7648121.pdf?src-supplier=Element14, Connector Type="Male Pin", Contact Gender=Male, Contact Material="Copper Alloy,Copper", Contact Plating=Gold, Datasheet URL=https://katalog.we-online.de/em/datasheet/6120xx21621.pdf, Gender=Male, Height=8.85mm, Housing Material=PBT, Lead Free="Lead Free", Length=9.1mm, Manufacturer Part Number=61201021621, Manufacturer URL=http://www.we-online.de, Mount="Through Hole", Mounting Technology=THT, Number of Contacts=10, Number of Positions=10, Number of Rows=2, Orientation=Vertical, Package Reference=61201021621, Packaging=Tray, Part Number=61201021621, Pin Number=10, Pitch=2.54mm, Pricing 1="1=0.45000, 10=0.43700, 50=0.40300, 100=0.36100, 260=0.31900, 520=0.31100 (USD)", Published Date=August2018, Publisher=WurthElektronik, REACH SVHC=Unknown, RoHS=Yes, Row Spacing=0.1inch, Stock 1=13858, Supplier 1=Digi-Key, Termination=Solder, Width=20.36mm
F1 F2: library part CMP-26292-000006-1, "FUSE CLIP CARTRIDGE 10A PCB", Ambient Temperature Range High=+85°C, Ambient Temperature Range Low=-40°C, Fuse Current=10A, Manufacturer=Schurter, Package=0, Voltage Rating Ac=500V, Automotive=No, Category=Fuse, ComponentLink2Description=Datasheet, ComponentLink2URL=https://us.schurter.com/bundles/snceschurter/epim/_ProdPool_/newDS/en/typ_OG__Clip__5x20.pdf, Conn Orientation=Horizontal, Device Class L1="Circuit Protection", Device Class L2="Fuse Holders", Device Class L3=unset, Digikey Description="FUSE CLIP CARTRIDGE 10A PCB", Height=8.9mm, Lead Free=Yes, Manufacturer Part Number=0751.0110, Number Of Fuses=1, Octopart=https://octopart.com/0751.0110-schurter-19402, RoHS=TRUE, Voltage Rating Dc=500V
J1 J2: library part CMP-2000-05853-1, "Female Connector, Pitch 2.54 mm, 1 x 2 Position, Height 15.8 mm, Tail Length 3.8 mm,  / -55 to 85 degC, RoHS, Bulk", Color=White, Dielectric Material=PE, Frequency=4GHz, Manufacturer="TE Connectivity", Max Operating Temperature=185°C, Min Operating Temperature=-67°C, Package Description="Female Connector, Pitch 2.54 mm, 1 x 2 Position, Height 15.8 mm, Tail Length 3.8 mm", Package Quantity=100, Body Plating=Nickel, Category="RF / Coaxial Connectors", Coaxial Cable Types=-, Coaxial Termination=Solder, ComponentLink1Description=https://datasheet.ciiva.com/644/eng-cd-1337543-g-644734.pdf?src-supplier=Farnell, ComponentLink1URL=https://datasheet.ciiva.com/644/eng-cd-1337543-g-644734.pdf?src-supplier=Farnell, ComponentLink2Description=https://datasheet.ciiva.com/644/eng-cd-1337543-g-644734.pdf?src-supplier=Digi-Key, ComponentLink2URL=https://datasheet.ciiva.com/644/eng-cd-1337543-g-644734.pdf?src-supplier=Digi-Key, ComponentLink3Description=https://datasheet.ciiva.com/11763/0900766b805faaaa-11763772.pdf?src-supplier=RSComponents, ComponentLink3URL=https://datasheet.ciiva.com/11763/0900766b805faaaa-11763772.pdf?src-supplier=RSComponents, ComponentLink4Description=https://datasheet.ciiva.com/1115/580087-1115285.pdf?src-supplier=Element14, ComponentLink4URL=https://datasheet.ciiva.com/1115/580087-1115285.pdf?src-supplier=Element14, ComponentLink5Description=https://datasheet.ciiva.com/14567/70084602-14567445.pdf?src-supplier=Allied+Electronics, ComponentLink5URL=https://datasheet.ciiva.com/14567/70084602-14567445.pdf?src-supplier=Allied+Electronics, ComponentLink6Description=https://datasheet.ciiva.com/3133/eng-ds-6-1773448-5-zdc-rf-coax-50-75-ohm-1007-3133303.pdf?src-supplier=Avnet, ComponentLink6URL=https://datasheet.ciiva.com/3133/eng-ds-6-1773448-5-zdc-rf-coax-50-75-ohm-1007-3133303.pdf?src-supplier=Avnet, ComponentLink7Description=https://datasheet.ciiva.com/16653/eng-ds-6-1773448-5-zdc-rf-coax-50-75-ohm-1007-16653071.pdf?src-supplier=Avnet+Europe, ComponentLink7URL=https://datasheet.ciiva.com/16653/eng-ds-6-1773448-5-zdc-rf-coax-50-75-ohm-1007-16653071.pdf?src-supplier=Avnet+Europe, ComponentLink8Description=https://datasheet.ciiva.com/30238/eng-ds-6-1773448-5-zdc-rf-coax-50-75-ohm-1007-30238783.pdf?src-supplier=Onlinecomponents.com, ComponentLink8URL=https://datasheet.ciiva.com/30238/eng-ds-6-1773448-5-zdc-rf-coax-50-75-ohm-1007-30238783.pdf?src-supplier=Onlinecomponents.com, Connector Body Style=RightAngleJack, Connector Mounting=PCBMount, Connector System=Cable-to-Board, Connector Type=BNCCoaxial, Contact Material=Brass, Contact Plating=GoldPlatedContacts, Datasheet URL=http://www.te.com/commerce/DocumentDelivery/DDEController?Action=showdoc&DocId=Customer+Drawing%7F1337543%7FG%7Fpdf%7FEnglish%7FENG_CD_1337543_G.pdf%7F1-1337543-0, Datasheet Version="Rev. G, 12/2012", Depth=34.9mm, Fastening Type=Bayonet, Frequency Max=4GHz, Gender=Female, Housing Color=White, Impedance=50ohm, Insulation Material=Polyethylene, Length=14.7mm, Manufacturer URL=http://www.te.com/, Max Frequency=4GHz, Mounting Technology=ThroughHole, Number of Positions=1, Orientation="Right Angle", Package Reference=1-1337543-0, Packaging=Box, PCB Mount Retention=With, PCB Thickness=0.13inch, Plating=Nickel, Polarity=Normal, Pricing 1="1=1.67000, 10=1.51400, 25=1.42120, 50=1.35920, 100=1.29750, 250=1.17388, 500=1.08122, 1000=0.92676 (USD)", Product Range=-, Radiation Hardening=No, REACH SVHC=Unknown, RoHS=Yes, Sealable="No (Without)", Stock 1=5804, SVHC=ToBeAdvised, Tail Length=4.9mm, Termination=Solder
J3: library part CMP-1502-03258-1, "Series 102 - 5.00 mm Horizontal Entry Modular with Pressure Clamp WR-TBL, 2 pin", Color=Blue, Current=15A, Manufacturer="Wurth Elektronik", Max Operating Temperature=105°C, Min Operating Temperature=-40°C, Operating Temperature=-40to105degC, Package Quantity=900, Supplier Part Number 1=732-2028-ND, Voltage=300V, Category="Terminal Blocks", ComponentLink1Description=https://datasheet.ciiva.com/824/6911027100xx-824045.pdf?src-supplier=Digi-Key, ComponentLink1URL=https://datasheet.ciiva.com/824/6911027100xx-824045.pdf?src-supplier=Digi-Key, ComponentLink2Description=https://datasheet.ciiva.com/48686/001088592-da-01-en-wr-tbl-terminal-block102-691102710002-48686823.pdf?src-supplier=Conrad, ComponentLink2URL=https://datasheet.ciiva.com/48686/001088592-da-01-en-wr-tbl-terminal-block102-691102710002-48686823.pdf?src-supplier=Conrad, Contact Material=Brass, Contact Plating=Tin, Current Rating=15A, Datasheet URL=http://katalog.we-online.de/em/datasheet/6911027100xx.pdf, Height=13.4mm, Housing Material=Nylon, Length=7.5mm, Manufacturer Part Number=691102710002, Manufacturer URL=http://www.we-online.de, Mount="Through Hole", Mounting Technology=THT, Number of Contacts=2, Number of Levels=1, Number of Positions Per Level=2, Package Reference=691102710002, Packaging=Box, Part Number=691102710002, Pin Number=2, Pitch=5.00mm, Plating=Steel, Pricing 1="1=0.69000, 10=0.61600, 50=0.53200, 100=0.48000 (USD)", Publisher=WurthElektronik, REACH SVHC=Unknown, RoHS=Yes, Stock 1=832, Stripping Length=-6mm, Supplier 1=Digi-Key, Termination=Screw, Voltage Rating=300V, Width=11.2mm, Wire Gauge (Max)=22AWG, Wire Gauge (Min)=14AWG, Wire/Cable Gauge=22AWG
LED1 LED2: library part CMP-1426-00017-1, "SMD mono-color Chip LED, WL-SMCW, Super Red", Case Code (Imperial)=1206, Case Code (Metric)=3216, Color="Super Red", Forward Current=30mA, Forward Voltage=1.9V, Manufacturer="Wuerth Elektronik", Max Operating Temperature=85°C, Min Operating Temperature=-40°C, Package Quantity=3000, Supplier Part Number 1=732-4992-1-ND, Test Current=20mA, Case/Package=1206, Category=LEDs, ComponentLink1Description="Manufacturer URL", ComponentLink1URL=http://www.we-online.com, ComponentLink2Description=Datasheet, ComponentLink2URL=http://katalog.we-online.com/led/datasheet/150120SS75000.pdf, ComponentLink3Description=https://datasheet.ciiva.com/29561/150120ss75000-29561862.pdf?src-supplier=Digi-Key, ComponentLink3URL=https://datasheet.ciiva.com/29561/150120ss75000-29561862.pdf?src-supplier=Digi-Key, ComponentLink4Description=https://datasheet.ciiva.com/29279/759443-da-01-en-chipled-1206-w-kl-s-rot-150120ss75000-29279053.pdf?src-supplier=Conrad, ComponentLink4URL=https://datasheet.ciiva.com/29279/759443-da-01-en-chipled-1206-w-kl-s-rot-150120ss75000-29279053.pdf?src-supplier=Conrad, ComponentLink5Description=https://datasheet.ciiva.com/29561/150120ss75000-29561863.pdf?src-supplier=Digi-Key, ComponentLink5URL=https://datasheet.ciiva.com/29561/150120ss75000-29561863.pdf?src-supplier=Digi-Key, ComponentLink6Description=https://datasheet.ciiva.com/48430/150120ss75000-eng-tds-48430055.pdf?src-supplier=Distrelec, ComponentLink6URL=https://datasheet.ciiva.com/48430/150120ss75000-eng-tds-48430055.pdf?src-supplier=Distrelec, ComponentLink7Description=https://datasheet.ciiva.com/29561/150120ss75000-29561864.pdf?src-supplier=Digi-Key, ComponentLink7URL=https://datasheet.ciiva.com/29561/150120ss75000-29561864.pdf?src-supplier=Digi-Key, Dominant Wavelength=630nm, Height=0.68mm, Length=3.2mm, Lens Style=Clear,Rectangular, Luminous Intensity=60mcd, Manufacturer Part Number=150120SS75000, Mount="Surface Mount", PackageReference=1206_A, Packaging="Tape and Reel", PartNumber=150120SS75000, Pricing 1="1=0.21000, 50=0.19800, 100=0.17100, 500=0.14800 (USD)", REACH SVHC=Unknown, RoHS=Yes, Stock 1=4278, Supplier 1=Digi-Key, Viewing Angle=140°, Wavelength=630nm, Width=1.6mm
P1 P3 P4 P5 P6: "Header, 3-Pin", LatestRevisionDate=17-Jul-2002, LatestRevisionNote="Re-released for DXP Platform.", Publisher="Altium Limited"
P2: "Header, 2-Pin", LatestRevisionDate=17-Jul-2002, LatestRevisionNote="Re-released for DXP Platform.", Publisher="Altium Limited"
P7: "Header, 8-Pin, Dual row", LatestRevisionDate=17-Jul-2002, LatestRevisionNote="Re-released for DXP Platform.", Publisher="Altium Limited"
P8 UART: "Header, 5-Pin", LatestRevisionDate=17-Jul-2002, LatestRevisionNote="Re-released for DXP Platform.", Publisher="Altium Limited"
Q1: "NPN General Purpose Amplifier", ComponentLink1Description="Manufacturer Link", ComponentLink1URL=http://www.fairchildsemi.com/, ComponentLink2Description=Datasheet, ComponentLink2URL=http://www.fairchildsemi.com/ds/2N%2F2N3904.pdf, DatasheetVersion=1997, LatestRevisionDate=15-Jan-2003, LatestRevisionNote="PCB Footprint 'BCY-W3/D4.7' replaced", PackageDescription="TO, Flat Index; 3 In-Line, Axial Leads; Body Dia. 4.5mm; Leads 0.51 x 0.48 mm (max)", PackageReference=TO-92A, PackageVersion=Sep-1998, Published=8-Jun-2000, Publisher="Altium Limited"
R1 R8: library part CMP-1568-00001-1, "General Puprose Chip Resistor, 4700 Ohm +/- 1%, 0.125 W, -55 to 155 degC, 2-Pin SMD, RoHS, Tape and Reel", Case Code (Imperial)=0805, Case Code (Metric)=2012, Manufacturer=Yageo, Max Operating Temperature=155°C, Max Power Dissipation=125mW, Min Operating Temperature=-55°C, Package Quantity=5000, Power="0.125 W", Resistance="4700 Ohm", Supplier Part Number 1=311-4.70KCRCT-ND, Temperature Coefficient=100ppm/°C, Temperature Max="155 degC", Temperature Min="-55 degC", Tolerance="+/- 1%", Voltage Rating=150V, Case/Package=0805, Category="Chip SMD Resistors", ComponentLink1Description="Manufacturer URL", ComponentLink1URL=http://www.yageo.com/NewPortal/_en/index.jsp, ComponentLink2Description=Datasheet, ComponentLink2URL=http://www.yageo.com/documents/recent/PYu-RC_Group_51_RoHS_L-3.pdf, ComponentLink3Description=https://datasheet.ciiva.com/11808/0900766b8106beab-11808155.pdf?src-supplier=RSComponents, ComponentLink3URL=https://datasheet.ciiva.com/11808/0900766b8106beab-11808155.pdf?src-supplier=RSComponents, ComponentLink4Description=https://datasheet.ciiva.com/7941/444164-7941804.pdf?src-supplier=Element14, ComponentLink4URL=https://datasheet.ciiva.com/7941/444164-7941804.pdf?src-supplier=Element14, ComponentLink5Description=https://datasheet.ciiva.com/7941/1686128-7941805.pdf?src-supplier=Element14, ComponentLink5URL=https://datasheet.ciiva.com/7941/1686128-7941805.pdf?src-supplier=Element14, ComponentLink6Description=https://datasheet.ciiva.com/7941/444164-7941806.pdf?src-supplier=Element14, ComponentLink6URL=https://datasheet.ciiva.com/7941/444164-7941806.pdf?src-supplier=Element14, ComponentLink7Description=https://datasheet.ciiva.com/6547/pyu-r-int-thick-7-6547263.pdf?src-supplier=Digi-Key, ComponentLink7URL=https://datasheet.ciiva.com/6547/pyu-r-int-thick-7-6547263.pdf?src-supplier=Digi-Key, ComponentLink8Description=https://datasheet.ciiva.com/46447/444164-46447583.pdf?src-supplier=Element14, ComponentLink8URL=https://datasheet.ciiva.com/46447/444164-46447583.pdf?src-supplier=Element14, Composition="Thick Film", DatasheetVersion="Rev. 3", Depth=1.25mm, Features="Moisture Resistant", Height=0.024inch, Lead Free="Lead Free", Length=0.079inch, Manufacturer Part Number=RC0805FR-074K7L, Military Standard=Not, Mounting Technology="Surface Mount", Number of Pins=2, Number of Terminations=2, PackageDescription="2-Pin Surface Mount Device, Body 2 x 1.25 mm", Packaging="Tape and Reel", Packing="Tape and Reel", PartNumber=RC0805FR-074K7L, Power Rating=125mW, Pricing 1="1=0.10000, 10=0.03900, 100=0.01570, 1000=0.00705, 2500=0.00612 (USD)", REACH SVHC="No SVHC", RoHS=TRUE, Stock 1=2280022, Supplier 1=Digi-Key, Termination=SMD/SMT, Voltage Rating (DC)=150V, Width=0.049inch
R2 R3 R7 R10: library part CMP-2001-03663-1, Case Code (Imperial)=0805, Case Code (Metric)=2012, Manufacturer="Vishay Dale", Max Operating Temperature=155°C, Max Power Dissipation=125mW, Min Operating Temperature=-55°C, Package Quantity=10, Resistance=200R, Supplier Part Number 1=541-200CCT-ND, Temperature Coefficient=100ppm/°C, Tolerance=1%, Voltage Rating=150V, Case/Package=0805, Category="Chip SMD Resistors", ComponentLink1Description=https://datasheet.ciiva.com/11809/0900766b80d98b26-11809981.pdf?src-supplier=RSComponents, ComponentLink1URL=https://datasheet.ciiva.com/11809/0900766b80d98b26-11809981.pdf?src-supplier=RSComponents, ComponentLink2Description=https://datasheet.ciiva.com/2467/dcrcwe3-2467524.pdf?src-supplier=Digi-Key, ComponentLink2URL=https://datasheet.ciiva.com/2467/dcrcwe3-2467524.pdf?src-supplier=Digi-Key, ComponentLink3Description=https://datasheet.ciiva.com/2467/dcrcwe3-2467525.pdf?src-supplier=Digi-Key, ComponentLink3URL=https://datasheet.ciiva.com/2467/dcrcwe3-2467525.pdf?src-supplier=Digi-Key, ComponentLink4Description=https://datasheet.ciiva.com/17167/dcrcwe3-17167157.pdf?src-supplier=Avnet+Europe, ComponentLink4URL=https://datasheet.ciiva.com/17167/dcrcwe3-17167157.pdf?src-supplier=Avnet+Europe, ComponentLink5Description=https://datasheet.ciiva.com/2467/dcrcwe3-2467526.pdf?src-supplier=Digi-Key, ComponentLink5URL=https://datasheet.ciiva.com/2467/dcrcwe3-2467526.pdf?src-supplier=Digi-Key, ComponentLink6Description=https://datasheet.ciiva.com/7673/1697337-7673478.pdf?src-supplier=Element14, ComponentLink6URL=https://datasheet.ciiva.com/7673/1697337-7673478.pdf?src-supplier=Element14, ComponentLink7Description=https://datasheet.ciiva.com/16755/70201119-16755607.pdf?src-supplier=Allied+Electronics, ComponentLink7URL=https://datasheet.ciiva.com/16755/70201119-16755607.pdf?src-supplier=Allied+Electronics, ComponentLink8Description=https://datasheet.ciiva.com/7673/1697337-7673336.pdf?src-supplier=Element14, ComponentLink8URL=https://datasheet.ciiva.com/7673/1697337-7673336.pdf?src-supplier=Element14, ComponentLink9Description=https://datasheet.ciiva.com/5542/dcrcwe3-109170-5542762.pdf?src-supplier=Mouser, ComponentLink9URL=https://datasheet.ciiva.com/5542/dcrcwe3-109170-5542762.pdf?src-supplier=Mouser, ComponentLink10Description=https://datasheet.ciiva.com/26317/fld-crcw-e3-data-en-26317339.pdf?src-supplier=Distrelec, ComponentLink10URL=https://datasheet.ciiva.com/26317/fld-crcw-e3-data-en-26317339.pdf?src-supplier=Distrelec, ComponentLink11Description=https://datasheet.ciiva.com/3258/dcrcwe3-3258302.pdf?src-supplier=Avnet, ComponentLink11URL=https://datasheet.ciiva.com/3258/dcrcwe3-3258302.pdf?src-supplier=Avnet, ComponentLink12Description=https://datasheet.ciiva.com/16199/dcrcwe3-16199471.pdf?src-supplier=Future+Electronics, ComponentLink12URL=https://datasheet.ciiva.com/16199/dcrcwe3-16199471.pdf?src-supplier=Future+Electronics, ComponentLink13Description=https://datasheet.ciiva.com/16786/70201119-16786975.pdf?src-supplier=Allied+Electronics, ComponentLink13URL=https://datasheet.ciiva.com/16786/70201119-16786975.pdf?src-supplier=Allied+Electronics, Composition="Thick Film", Contact Plating=Tin, Depth=1.25mm, Features="Automotive AEC-Q200", Height=0.45mm, Lead Free="Lead Free", Length=2mm, Manufacturer Part Number=CRCW0805200RFKEA, Military Standard=Not, Mount="Surface Mount", Number of Pins=2, Number of Terminations=2, Packaging="Tape and Reel", Part Number=CRCW0805200RFKEA, Power Rating=125mW, Pricing 1="1=0.10000, 10=0.06000, 100=0.02450, 1000=0.01102, 2500=0.00957 (USD)", Radiation Hardening=No, REACH SVHC=Unknown, RoHS=Yes, Stock 1=97163, Supplier 1=Digi-Key, Termination=SMD/SMT, Voltage Rating (DC)=150V, Weight=0.000194oz, Width=0.049inch, Working Voltage=150V